# Altium PCB PCB1_ASC.PcbDoc
Units mil, origin at the board's own origin, x right, y up, seen from the top; angles counter-clockwise.
Board outline 2755.91 x 2165.35 mil, 2 copper layers (Top Layer, Bottom Layer); 63 components, 46 nets, 198 pads, 42 vias.
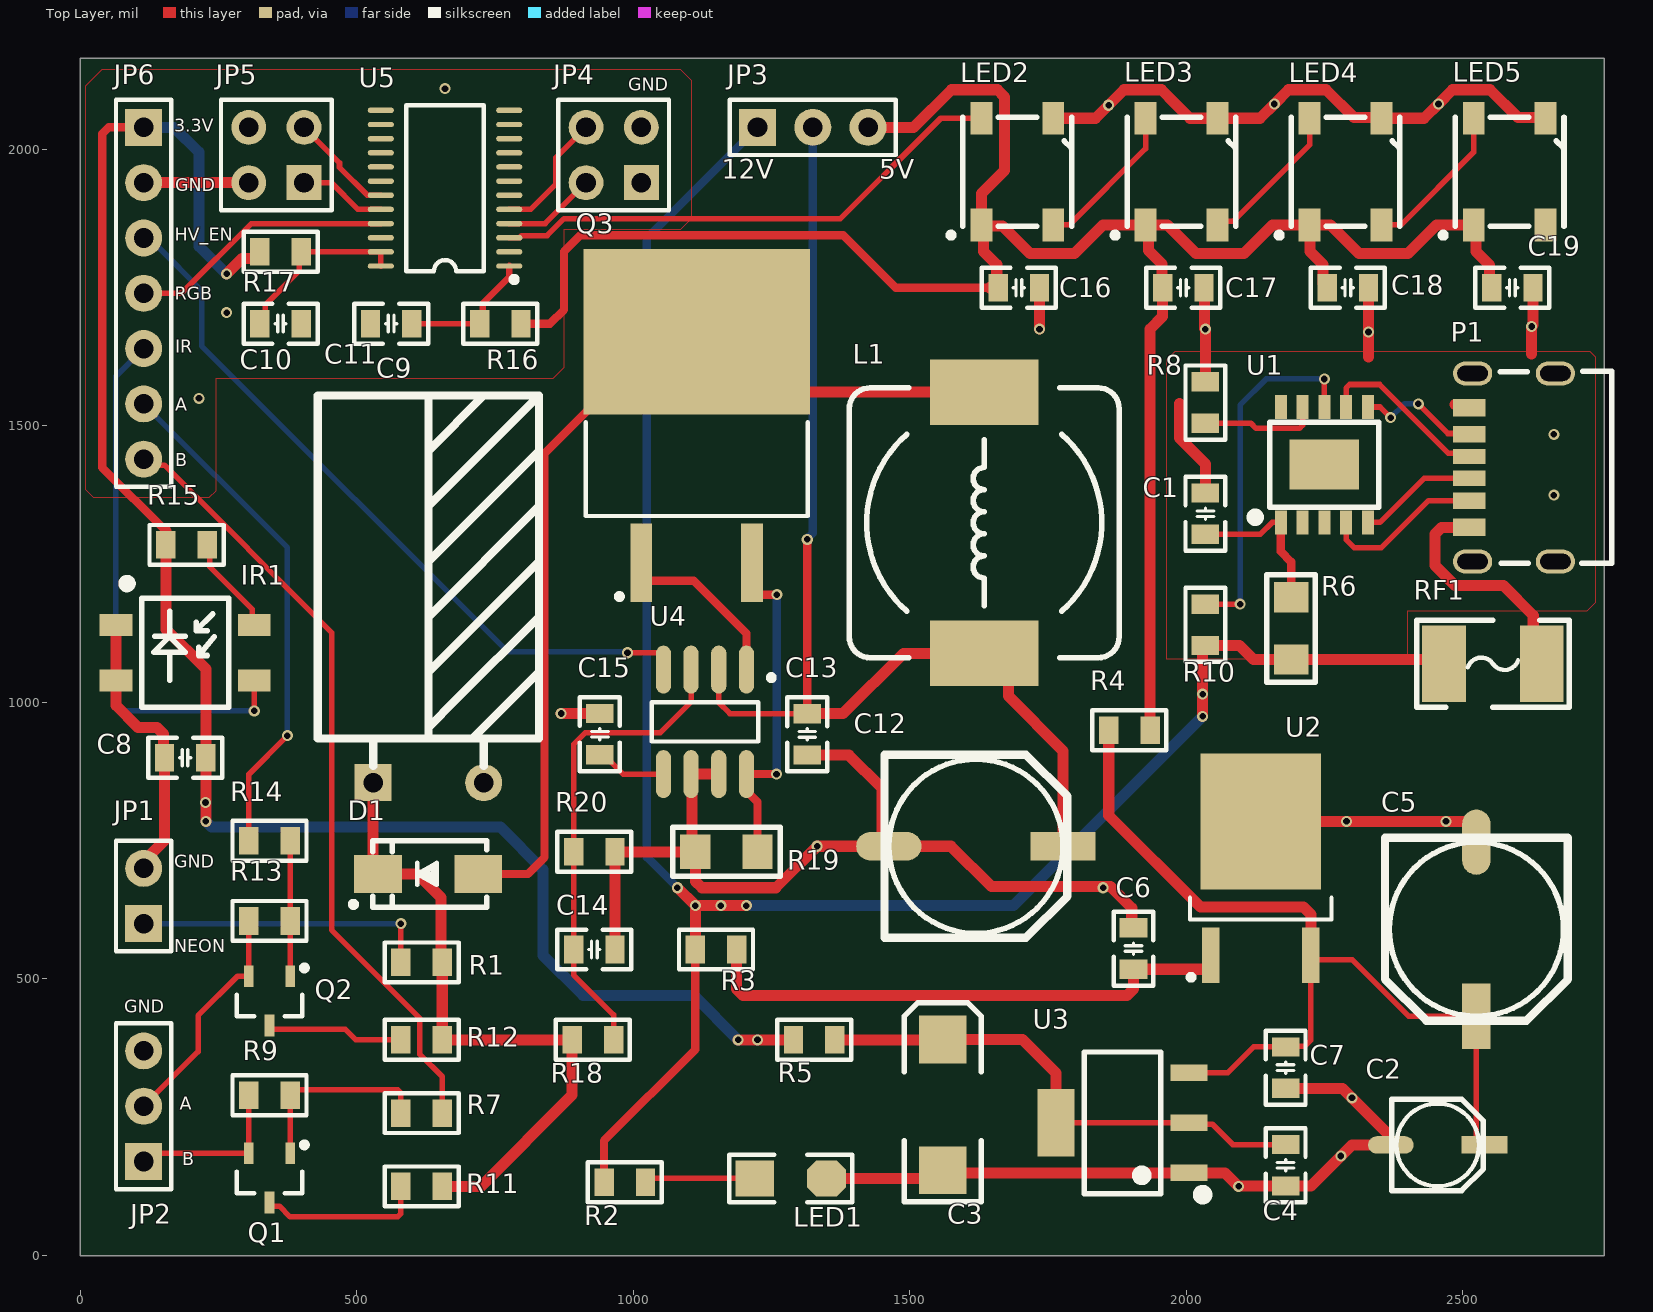
[diagram p0: Top Layer view]
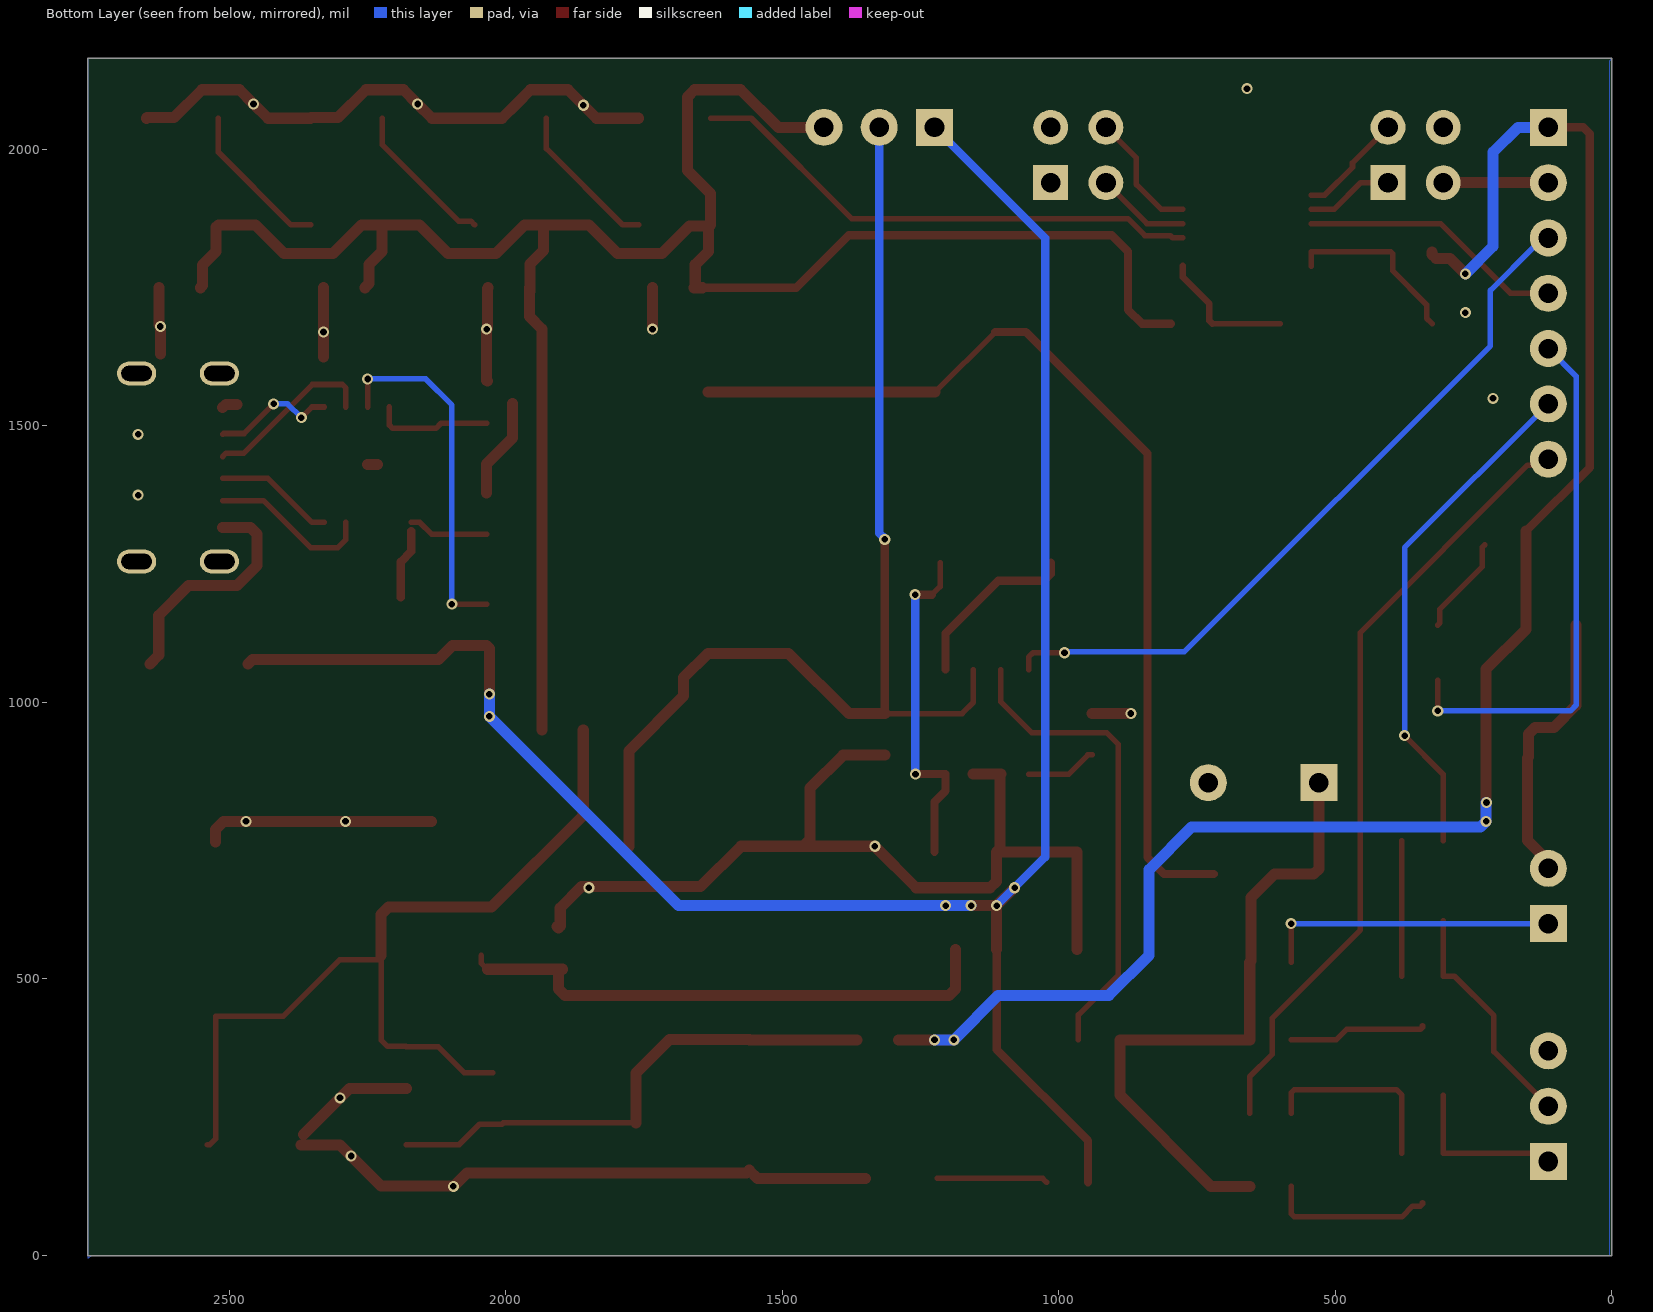
[diagram p1: Bottom Layer view, seen from below]

## Layer stack, top to bottom
Top Solder: solder mask 0.4, Solder Resist, Dk 3.5
Top Layer: signal copper 1.4
Dielectric 1: dielectric 12.6, FR-4, Dk 4.8
Bottom Layer: signal copper 1.4
Bottom Solder: solder mask 0.4, Solder Resist, Dk 3.5

## Board outline
0,0 0,2165.35 2755.91,2165.35 2755.91,0

## Design rules (kind name [scope] priority, off if disabled: settings)
AssemblyTestPointUsage [All] p0: scope1count=1 scope1_0_kind=Board scope1_0_value=Board scope2count=1 scope2_0_kind=Board scope2_0_value=Board commentlength=0
AssemblyTestpoint [All] p0: scope1count=1 scope1_0_kind=Board scope1_0_value=Board scope2count=1 scope2_0_kind=Board scope2_0_value=Board commentlength=0
Clearance [All] p0: scope1count=1 scope1_0_kind=Board scope1_0_value=Board scope2count=1 scope2_0_kind=Board scope2_0_value=Board commentlength=0 gap=10
Clearance [All] p1: gap=10 ignorepadtopadclearanceinfootprint=FALSE except(8: Arc-Arc Arc-Track Track-Track; 12: Arc-SMDPad Arc-THPad Track-SMDPad Track-THPad)
ComponentClearance [All] p0: scope1count=1 scope1_0_kind=Board scope1_0_value=Board scope2count=1 scope2_0_kind=Board scope2_0_value=Board commentlength=0 gap=10 collisioncheckmode=3
DiffPairsRouting [All] p0: scope1count=1 scope1_0_kind=Board scope1_0_value=Board scope2count=1 scope2_0_kind=Board scope2_0_value=Board commentlength=0
FabricationTestPointUsage [All] p0: scope1count=1 scope1_0_kind=Board scope1_0_value=Board scope2count=1 scope2_0_kind=Board scope2_0_value=Board commentlength=0 valid=0 allowmultiple=FALSE
FabricationTestpoint [All] p0: scope1count=1 scope1_0_kind=Board scope1_0_value=Board scope2count=1 scope2_0_kind=Board scope2_0_value=Board commentlength=0 side=3 testpointundercomponent=TRUE minsize=40 maxsize=100 preferedsize=60 minholesize=0 maxholesize=40 preferedholesize=32 testpointgrid=1
FanoutControl Fanout_BGA [All] p0 off: scope1count=1 scope1_0_kind=Board scope1_0_value=Board scope2count=1 scope2_0_kind=Board scope2_0_value=Board commentlength=69 // Protel DXP Scope 1 Expression Was: IsBGA   Fanout_BGA (Default Rule)
FanoutControl Fanout_LCC [All] p0 off: scope1count=1 scope1_0_kind=Board scope1_0_value=Board scope2count=1 scope2_0_kind=Board scope2_0_value=Board commentlength=69 // Protel DXP Scope 1 Expression Was: IsLCC   Fanout_LCC (Default Rule)
FanoutControl Fanout_SOIC [All] p0 off: scope1count=1 scope1_0_kind=Board scope1_0_value=Board scope2count=1 scope2_0_kind=Board scope2_0_value=Board commentlength=71 // Protel DXP Scope 1 Expression Was: IsSOIC   Fanout_SOIC (Default Rule)
FanoutControl Fanout_Small [All] p0 off: scope1count=1 scope1_0_kind=Board scope1_0_value=Board scope2count=1 scope2_0_kind=Board scope2_0_value=Board commentlength=84 // Protel DXP Scope 1 Expression Was: (CompPinCount < 5)   Fanout_Small (Default Rule)
FanoutControl Fanout_Default [All] p0: scope1count=1 scope1_0_kind=Board scope1_0_value=Board scope2count=1 scope2_0_kind=Board scope2_0_value=Board commentlength=30 // Fanout_Default (Default Rule)
Height [All] p0: scope1count=1 scope1_0_kind=Board scope1_0_value=Board scope2count=1 scope2_0_kind=Board scope2_0_value=Board commentlength=0
HoleSize [All] p0: scope1count=1 scope1_0_kind=Board scope1_0_value=Board scope2count=1 scope2_0_kind=Board scope2_0_value=Board commentlength=0 absolutevalues=TRUE maxlimit=100 minlimit=1 maxpercent=80.000 minpercent=20.000
HoleToHoleClearance [All] p0: scope1count=1 scope1_0_kind=Board scope1_0_value=Board scope2count=1 scope2_0_kind=Board scope2_0_value=Board commentlength=0
LayerPairs [All] p0: scope1count=1 scope1_0_kind=Board scope1_0_value=Board scope2count=1 scope2_0_kind=Board scope2_0_value=Board commentlength=0 enforce=TRUE
MinimumSolderMaskSliver [All] p0: scope1count=1 scope1_0_kind=Board scope1_0_value=Board scope2count=1 scope2_0_kind=Board scope2_0_value=Board commentlength=0
NetAntennae [All] p0: scope1count=1 scope1_0_kind=Board scope1_0_value=Board scope2count=1 scope2_0_kind=Board scope2_0_value=Board commentlength=0
PasteMaskExpansion [All] p0: scope1count=1 scope1_0_kind=Board scope1_0_value=Board scope2count=1 scope2_0_kind=Board scope2_0_value=Board commentlength=0 expansion=0
PlaneClearance [All] p0: scope1count=1 scope1_0_kind=Board scope1_0_value=Board scope2count=1 scope2_0_kind=Board scope2_0_value=Board commentlength=0 clearance=8
PlaneClearance [All] p1: clearance=8
PlaneConnect [All] p0: scope1count=1 scope1_0_kind=Board scope1_0_value=Board scope2count=1 scope2_0_kind=Board scope2_0_value=Board commentlength=0 planeconnectstyle=Relief reliefexpansion=20 reliefentries=4 reliefconductorwidth=10 reliefairgap=10
PolygonConnect [All] p0: scope1count=1 scope1_0_kind=Board scope1_0_value=Board scope2count=1 scope2_0_kind=Board scope2_0_value=Board commentlength=0 connectstyle=Relief reliefconductorwidth=15 reliefentries=4 polygonreliefangle="90 Angle"
PolygonConnect [All] p1: thpad.connectstyle=Relief thpad.reliefconductorwidth=15 thpad.reliefentries=4 thpad.polygonreliefangle="90 Angle" thpad.airgapwidth=10 smdpad.connectstyle=Relief smdpad.reliefconductorwidth=15 smdpad.reliefentries=4 smdpad.polygonreliefangle="90 Angle" smdpad.airgapwidth=10 via.connectstyle=Direct via.reliefconductorwidth=10 via.reliefentries=4 via.polygonreliefangle="90 Angle" via.airgapwidth=10
RoutingCorners [All] p0: scope1count=1 scope1_0_kind=Board scope1_0_value=Board scope2count=1 scope2_0_kind=Board scope2_0_value=Board commentlength=0 cornerstyle=45-Degree minsetback=100 maxsetback=100
RoutingLayers [All] p0: scope1count=1 scope1_0_kind=Board scope1_0_value=Board scope2count=1 scope2_0_kind=Board scope2_0_value=Board commentlength=0 top layer=Automatic bottom layer=Automatic
RoutingPriority [All] p0: scope1count=1 scope1_0_kind=Board scope1_0_value=Board scope2count=1 scope2_0_kind=Board scope2_0_value=Board commentlength=0
RoutingTopology [All] p0: scope1count=1 scope1_0_kind=Board scope1_0_value=Board scope2count=1 scope2_0_kind=Board scope2_0_value=Board commentlength=0 topology=Shortest
RoutingVias [All] p0: scope1count=1 scope1_0_kind=Board scope1_0_value=Board scope2count=1 scope2_0_kind=Board scope2_0_value=Board commentlength=0 holewidth=12 width=22 viastyle="Through Hole" minholewidth=12 minwidth=22 maxholewidth=12 maxwidth=22
RoutingVias [All] p1: holewidth=12 width=22 viastyle="Through Hole" minholewidth=12 minwidth=22 maxholewidth=12 maxwidth=22
ShortCircuit [All] p0: scope1count=1 scope1_0_kind=Board scope1_0_value=Board scope2count=1 scope2_0_kind=Board scope2_0_value=Board commentlength=0 allowed=FALSE
SilkToBoardRegionClearance [All] p0: scope1count=1 scope1_0_kind=Board scope1_0_value=Board scope2count=1 scope2_0_kind=Board scope2_0_value=Board commentlength=0
SilkToSilkClearance [All] p0: scope1count=1 scope1_0_kind=Board scope1_0_value=Board scope2count=1 scope2_0_kind=Board scope2_0_value=Board commentlength=0
SilkToSolderMaskClearance [All] p0 off: scope1count=1 scope1_0_kind=Board scope1_0_value=Board scope2count=1 scope2_0_kind=Board scope2_0_value=Board commentlength=44 // Protel DXP Scope 1 Expression Was: IsPad
SilkToSolderMaskClearance [IsPad] p1: minsilkscreentomaskgap=2 clearancetoexposedcopper=TRUE
SolderMaskExpansion [All] p0: scope1count=1 scope1_0_kind=Board scope1_0_value=Board scope2count=1 scope2_0_kind=Board scope2_0_value=Board commentlength=0 expansion=4
SolderMaskExpansion [All] p1: expansion=4 istentingtop=FALSE
UnRoutedNet [All] p0: scope1count=1 scope1_0_kind=Board scope1_0_value=Board scope2count=1 scope2_0_kind=Board scope2_0_value=Board commentlength=0
UnpouredPolygon [All] p0: scope1count=1 scope1_0_kind=Board scope1_0_value=Board scope2count=1 scope2_0_kind=Board scope2_0_value=Board commentlength=0
Width power [All] p0: scope1count=1 scope1_0_kind=NetClass scope1_0_value=power scope2count=1 scope2_0_kind=Board scope2_0_value=Board commentlength=0 maxlimit=30 minlimit=10 preferedwidth=20
Width [All] p0: scope1count=1 scope1_0_kind=Board scope1_0_value=Board scope2count=1 scope2_0_kind=Board scope2_0_value=Board commentlength=0 maxlimit=12 minlimit=6 preferedwidth=10
Width power [InNetClass('power')] p1: maxlimit=30 minlimit=10 preferedwidth=20
Width [All] p2: maxlimit=12 minlimit=6 preferedwidth=10
28 further rules are at their usual default settings.

## Classes and differential pairs
net class power: GND V3.3 V5 V12 VH

## Components (designator, comment, footprint, x,y, rotation, side; value= is the part's Value field where it differs from the comment)
C1 "" "C 0805_L" 2035,1341.4 r90 top
C2 "Cap Pol1" "CM B(4*5.4)" 2455,200 r0 top
C3 "Cap Pol1" "CD C(6032)" 1560,272.28 r270 top
C4 "Cap" "C 0805_L" 2180,163.21 r90 top
C5 "Cap Pol1" "CM E(8*10.2)" 2525,590 r270 top
C6 "Cap" "C 0805_L" 1905,555 r270 top
C7 "Cap" "C 0805_L" 2180,339.69 r90 top
C8 "Cap" "C 0805_L" 190,900 r180 top
C9 "Cap" "C 0805_L" 562.6,1685 r0 top
C10 "Cap" "C 0805_L" 362.6,1685 r0 top
C11 "Cap Pol1" "CAP 5.0*10*16-H - GD" 630,855 r0 top
C12 "Cap Pol1" "CM E(8*10.2)" 1620,740 r0 top
C13 "Cap" "C 0805_L" 1315,942.41 r90 top
C14 "Cap" "C 0805_L" 930,553.33 r180 top
C15 "Cap" "C 0805_L" 940,942.6 r90 top
C16 "Cap" "C 0805_L" 1697.6,1750 r180 top
C17 "Cap" "C 0805_L" 1995.06,1750 r180 top
C18 "Cap" "C 0805_L" 2292.53,1750 r180 top
C19 "Cap" "C 0805_L" 2590,1750 r180 top
D1 "US2G" SMA 629.45,690 r180 top
IR1 "IRM-H6XXT" SMD4_IR 190,1090 r0 top
JP1 "HDR-1X2" HDR2.54-LI-2P 115,650 r90 top
JP2 "HDR-1X3" HDR2.54-LI-3P 115,270 r90 top
JP3 "HDR-1X3" HDR2.54-LI-3P 1325,2040 r0 top
JP4 "Header2X2" HDR2.54-LI-2x2P 965,1990 r90 top
JP5 "Header2X2" HDR2.54-LI-2x2P 355,1990 r90 top
JP6 "HDR-1X7" HDR2.54-LI-7P 115,1740 r270 top
L1 "Inductor Iron" CDRH127 1635,1325 r90 top
LED1 "红色" "LED 1206R" 1285,139.28 r0 top
LED2 "WS2812C" WS2812 1695,1960 r90 top
LED3 "WS2812C" WS2812 1991.67,1960 r90 top
LED4 "WS2812C" WS2812 2288.33,1960 r90 top
LED5 "WS2812C" WS2812 2585,1960 r90 top
P1 "Type-C" USB-C-SMD_10P-P1.00-L6.8-W8.9 2590,1425 r180 top
Q1 "A42" SOT23-3L 342.6,140 r180 top
Q2 "A42" SOT23-3L 342.6,460 r180 top
Q3 "IRF740" TO-263-2L 1115,1500.71 r90 top
R1 "Res Semi" "R 0805_L" 617.59,530 r180 top
R2 "Resistor" "R 0805_L" 985,132.28 r180 top
R3 "Resistor" "R 0805_L" 1150,553.33 r180 top
R4 "Resistor" "R 0805_L" 1897.6,950 r0 top
R5 "Resistor" "R 0805_L" 1327.6,390 r180 top
R6 "Resistor" "R 1206_L" 2190,1134.88 r270 top
R7 "Resistor" "R 0805_L" 617.59,257.5 r0 top
R8 "Resistor" "R 0805_L" 2035,1542.4 r270 top
R9 "Resistor" "R 0805_L" 342.6,290 r180 top
R10 "Resistor" "R 0805_L" 2035,1140.41 r90 top
R11 "Res Semi" "R 0805_L" 617.6,125 r180 top
R12 "Res Semi" "R 0805_L" 617.6,390 r180 top
R13 "Resistor" "R 0805_L" 342.6,605 r180 top
R14 "Resistor" "R 0805_L" 342.6,750 r180 top
R15 "Resistor" "R 0805_L" 192.59,1285 r180 top
R16 "Resistor" "R 0805_L" 760,1685 r0 top
R17 "Resistor" "R 0805_L" 362.59,1815 r180 top
R18 "Res Semi" "R 0805_L" 927.4,390 r0 top
R19 "Res Semi" "R 1206_L" 1169.88,730 r180 top
R20 "Resistor" "R 0805_L" 930,730 r180 top
RF1 "750mA" "FU 1812" 2555,1070 r180 top
U1 "CH224K" ESSOP10 2250,1430 r90 top
U2 "L78M05" TO-252-2L 2135,700 r90 top
U3 "LT1117-3V3" SOT223_L 1885,240 r90 top
U4 "MAX1771" SOIC8 1130,965 r270 top
U5 "SN74LVC4245A" TSSOP24_L 660,1930 r180 top

## Footprints (in the part's own frame and the unit in brackets; to place one, negate y for a bottom-side part, rotate by r counter-clockwise, add the part's x,y. Pads: shape width x height; smd on the part's side, far side on the other; paste and mask are expansions set on the pad)
"C 0805_L" [mil] "无极性贴片电容                                        淘宝ID:黄晶宝石"
  rect 35x50 smd: 1(-37.4,0) 2(37.4,0)
  silkscreen extent -67,-36 67,36
"CAP 5.0*10*16-H - GD" [mm] "脚距5mm直径10mm高度16mm"
  rect 1.7x1.7 hole 0.9: 1(-2.54,0)
  round 1.7 hole 0.9: 2(2.54,0)
  silkscreen extent -5.08,0.76 5.08,17.78
"CD C(6032)" [mm] "长6.0mm，宽3.2mm，厚2.5mm      淘宝ID:黄晶宝石"
  rect 2.2x2.2 smd: 1(-3,0) 2(3,0)
  silkscreen extent -4.7,-1.78 4.44,1.78
CDRH127 [mm] "12*12*8mm（长宽高）"
  rect 3x5 smd: 1(-6,0) 2(6,0)
  silkscreen extent -6.2,-6.2 6.2,6.2
"CM B(4*5.4)" [mm] "贴片电解电容，直径4mm，高5.4mm          淘宝ID:黄晶宝石"
  rect 2.1x0.8 smd: 1(2.15,0)
  oval 2.1x0.8 smd: 2(-2.15,0)
  silkscreen extent -2.1,-2.1 2.1,2.1
"CM E(8*10.2)" [mm] "贴片电解电容，直径8mm，高10.2mm        淘宝ID:黄晶宝石"
  rect 3x1.3 smd: 1(4,0)
  oval 3x1.3 smd: 2(-4,0)
  silkscreen extent -4.2,-4.2 4.2,4.2
ESSOP10 [mm] "ESSOP3.9mm"
  rect 2.3x3.2 smd: 0(0,0)
  rect 1.1x0.55 smd: 1(-2.65,2) 2(-2.65,1) 3(-2.65,0) 4(-2.65,-1) 5(-2.65,-2) 6(2.65,-2) 7(2.65,-1) 8(2.65,0) 9(2.65,1) 10(2.65,2)
  silkscreen extent -2.61,-2.5 1.95,3.37
"FU 1812" [mm] "贴片保险丝          淘宝ID:黄晶宝石"
  rect 2x3.5 smd: 1(-2.25,0) 2(2.25,0)
  silkscreen extent -3.5,-2 3.5,2
HDR2.54-LI-2P [mm] "封装库来自淘宝卖家 ID：黄晶宝石"
  rect 1.7x1.7 hole 0.9: 1(-1.27,0)
  round 1.7 hole 0.9: 2(1.27,0)
  silkscreen extent -2.54,-1.27 2.54,1.27
HDR2.54-LI-2x2P [mm] "封装库来自淘宝卖家 ID：黄晶宝石"
  rect 1.6x1.6 hole 0.9: 1(-1.27,-1.27)
  round 1.6 hole 0.9: 2(-1.27,1.27) 3(1.27,-1.27) 4(1.27,1.27)
  silkscreen extent -2.54,-2.54 2.54,2.54
HDR2.54-LI-3P [mm] "排针，3脚"
  rect 1.7x1.7 hole 0.9: 1(-2.54,0)
  round 1.7 hole 0.9: 2(0,0) 3(2.54,0)
  silkscreen extent -3.81,-1.27 3.81,1.27
HDR2.54-LI-7P [mm] "排针，7脚"
  rect 1.7x1.7 hole 0.9: 1(-7.62,0)
  round 1.7 hole 0.9: 2(-5.08,0) 3(-2.54,0) 4(0,0) 5(2.54,0) 6(5.08,0) 7(7.62,0)
  silkscreen extent -8.89,-1.27 8.89,1.27
"LED 1206R" [mil] "红色1206LED       淘宝ID:黄晶宝石"
  rect 70x65 smd: 1(-65,0)
  oct 70x65 smd: 2(65,0)
  silkscreen extent -111,-43 111,43
"R 0805_L" [mil] "1/8W贴片电阻"
  rect 35x50 smd: 1(-37.4,0) 2(37.4,0)
  silkscreen extent -67,-36 67,36
"R 1206_L" [mil] "1/4W贴片电阻"
  rect 55x62 smd: 1(-55.12,0) 2(57.09,0)
  silkscreen extent -96,-44 98,44
SMA [mm] "4.5x2.6*2.2mm（长宽高，不包括引脚）"
  rect 2.2x1.75 smd: 1(-2.3,0) 2(2.3,0)
  silkscreen extent -2.7,-1.52 3.56,1.52
SMD4_IR [mm]
  rect 1.5x1 smd: 1(-3.175,1.27) 2(-3.175,-1.27) 3(3.175,-1.27) 4(3.175,1.27)
  silkscreen extent -2.87,-2.5 2,3.37
SOIC8 [mm]
  oval 2.2x0.7 smd: 1(-2.4,1.905) 2(-2.4,0.635) 3(-2.4,-0.635) 4(-2.4,-1.905) 5(2.4,-1.905) 6(2.4,-0.635) 7(2.4,0.635) 8(2.4,1.905)
  silkscreen extent -2.16,-2.45 0.9,3.17
SOT23-3L [mm] "3x1.3x1mm(长宽高)    封装库来自淘宝卖家 ID：黄晶宝石"
  rect 0.45x1 smd: 1(-0.95,-1.143) 2(0.95,-1.143) 3(0,1.125)
  silkscreen extent -1.73,-1.65 1.5,0.7
SOT223_L [mm] "6.4x7x1.6mm(长宽高)"
  rect 0.75x1.7 smd: 1(-2.3,-3.048) 2(0,-3.048) 3(2.3,-3.048)
  rect 3.1x1.7 smd: 2(0,3.048)
  silkscreen extent -3.5,-3.88 3.25,1.75
TO-252-2L [mm]
  rect 2.55x0.8 smd: 1(-4,2.3) 2(-4,-2.3)
  rect 6.25x5.55 smd: 3(2.15,0)
  silkscreen extent -5.12,-3.25 -1.35,3.32
TO-263-2L [mm]
  rect 3.6x1 smd: 1(-6.3,2.54) 3(-6.3,-2.54)
  rect 7.6x10.4 smd: 2(4.3,0)
  silkscreen extent -7.97,-5.1 0.15,5.1
TSSOP24_L [mm] "7.8*6.4*1mm（长宽高） 封装库来自淘宝卖家 ID：黄晶宝石"
  oval 1.2x0.25 smd: 1(-2.95,3.575) 2(-2.95,2.925) 3(-2.95,2.275) 4(-2.95,1.625) 5(-2.95,0.975) 6(-2.95,0.325) 7(-2.95,-0.325) 8(-2.95,-0.975) 9(-2.95,-1.625) 10(-2.95,-2.275) 11(-2.95,-2.925) 12(-2.95,-3.575) 13(2.95,-3.575) 14(2.95,-2.925) 15(2.95,-2.275) 16(2.95,-1.625) 17(2.95,-0.975) 18(2.95,-0.325) 19(2.95,0.325) 20(2.95,0.975) 21(2.95,1.625) 22(2.95,2.275) 23(2.95,2.925) 24(2.95,3.575)
  silkscreen extent -3.3,-3.81 1.78,4.32
USB-C-SMD_10P-P1.00-L6.8-W8.9 [mil]
  oval 70.82x43.31 hole 27.56 slot 55.16 at 0 deg: 0(-77.76,170.08) 0(-77.76,-170.08) 0(71.85,170.08) 0(71.85,-170.08)
  rect 59x31.5 smd: 1(77.76,108.25) 6(77.76,-108.25)
  rect 59x29.9 smd: 2(77.76,59.85) 5(77.76,-59.85)
  rect 59x27.6 smd: 3(77.76,19.7) 4(77.76,-19.7)
  silkscreen extent -180,-174 22,174
WS2812 [mm]
  rect 1.5x1 smd: 1(-2.45,1.65) 2(-2.45,-1.65) 3(2.45,-1.65) 4(2.45,1.65)
  silkscreen extent -3.05,-2.5 2.5,3.17

## Part data
C1: library part Cap, "Capacitor"
C2 C3: "Polarized Capacitor (Radial)"
C4 C6 C7 C8 C9 C10 C13 C14 C15 C16 C17 C18 C19: "Capacitor"
C5 C12: library part "Cap Pol1_2", "Polarized Capacitor (Radial)"
C11: library part "Cap Pol1_3", "Polarized Capacitor (Radial)"
D1: library part "D Schottky", "Schottky Diode"
IR1: library part IR
JP1: library part "Header 2", "2P接插件"
JP2 JP3: library part "Header 3", "3P接插件"
JP4 JP5: library part "Header 2X2", "2*2P接插件"
JP6: library part "Header 7", "7P接插件"
L1: "Magnetic-Core Inductor"
LED1: library part LED-SMD, "贴片LED"
LED2 LED3 LED4 LED5: library part WS2812, "RGB发光管"
P1: "Type-C 接口"
Q1 Q2: library part BCP68, "NPN三极管"
Q3: library part NMOS-2, "N-Channel Power MOSFET"
R1 R11 R12 R18 R19: "Semiconductor Resistor"
RF1: library part PPTC, "PPTC自恢复保险丝"
U1: "PD协议受电芯片"
U3: library part AMS1117, "三端稳压芯片"
U5: library part 74LVC4245, "双向电平转换"

## Via types
v1: diameter 20, hole 12, Top Layer to Bottom Layer, tented both sides, 42 vias

## Nets (pads, with @x,y where several pads share a name; then routed paths per layer and width w, separated by ;. In a path a pad name is that pad's centre, name@x,y a point inside that pad or via, vN(x,y) a via of type N, cw(c..) or ccw(c..) an arc to the next point about the centre after c; other vN are vias at no path point)
GND: C1.2 C2.2 C3.2 C4.1 C5.2 C6.1 C7.1 C8.2 C9.1 C10.2 C11.2 C12.2 C13.1 C14.1 C15.2 C16.1 C17.1 C18.1 C19.1 IR1.1 IR1.2 JP1.2 JP2.3 JP4.1 JP4.3 JP5.2 JP5.4 JP6.2 LED1.2 LED2.3 LED3.3 LED4.3 LED5.3 P1.0 P1.6 R8.1 R19.2 R20.1 U1.0 U2.3 U3.1 U4.6 U4.7 U5.2 U5.6 U5.7 U5.8 U5.9 U5.10 U5.11 U5.12 U5.13 U5.14 U5.15 U5.16 U5.17 U5.18 U5.22 | length 5969.5
  Top Layer w20: IR1.1 IR1.2 65,995 105,955 139.24,955 150.96,943.28 150.96,901.65 C8.2 152.6,750.3 115,712.7 JP1.2 ; JP6.2 JP5.2 ; v1(870,980) C15.2 ; C14.1 R20.1 R19.2 ; U4.7 U4.6 1106.45,869.07 1106.45,736.35 R19.2 ; C13.1 1390,905 1450,845 1450,752.52 C12.2 ; LED1.2 1545.11,139.28 C3.2 1564.73,149.45 U3.1 2070.55,149.45 v1(2095,125) ; v1(1735,1675) C16.1 ; LED2.3 1836.46,2056.46 v1(1860,2080) 1887.98,2107.98 1955.5,2107.98 1981.22,2082.26 1981.22,2082.17 2006.94,2056.46 LED3.3 2133.94,2056.46 v1(2159.7,2082.22) 2185.47,2107.98 2253.09,2107.98 2303.61,2057.47 2352.28,2057.47 LED4.3 2430.6,2056.46 v1(2456.37,2082.22) 2482.13,2107.98 2549.76,2107.98 2600.28,2057.47 2648.95,2057.47 LED5.3 ; C6.1@1907.59,595 C6.1 1901.81,595.59 1901.81,628.19 1863.03,666.97 1648.03,666.97 1575,740 C12.2 ; 1988,1540.3 1988,1478.39 2035,1431.39 C1.2 ; C17.1 2033.73,1748.74 2033.73,1676.27 v1(2035,1675) 2035,1582.33 R8.1@2033.73,1581.07 ; v1@2095,125.81 C4.1 2225.81,125.81 v1(2280,180) 2300,200 C2.2 ; U2.3 v1@2290,784.65 ; C7.1 2282.72,302.28 v1(2300,285) 2366.39,218.61 ; U1.0@2232.28,1430 U1.0 ; v1(2290,785) v1(2470,785) 2510.6,785 2525,770.6 C5.2 ; C18.1 2329.93,1625.07 2330,1625 ; P1.6@2486.01,1538.99 2506.49,1538.99 P1.6 ; 2625,1630 v1(2625,1680) 2627.4,1682.4 C19.1 ; R19.2 1112.8,676.72 1124.51,665 1258.02,665 v1(1333.02,740) C12.2
  other v1: 1850,665 2665,1375 2665,1485 215,1550 2330,1670 265,1705 660,2110
HV_EN: JP6.3 U4.4 | length 1303.8
  Top Layer w10: v1(990,1090) 1046.89,1090 1055,1081.89 U4.4
  Bottom Layer w10: JP6.3@140,1825 220,1745 220,1645 773.09,1091.91 988.09,1091.91 v1(990,1090)
IR: IR1.3 JP6.5 | length 975.2
  Top Layer w10: v1(315,985) IR1.3
  Bottom Layer w10: JP6.5 64.54,1589.54 64.54,995.46 75,985 v1(315,985)
NetC1_1: C1.1 R6.1 U1.1 | length 273.2
  Top Layer w10: C1.1 2134,1304 2155.86,1325.86 2171.07,1325.86 U1.1
  Top Layer w15: U1.1@2171.26,1310 2171.26,1273.04 2190,1254.3 R6.1
NetC2_1: C2.1 C5.1 C7.2 R4.1 U2.2 U3.3 | length 1632.8
  Top Layer w10: U3.3@2023.7,330.55 2075.55,330.55 2122.08,377.08 C7.2 2180.96,378.04 2214.15,378.04 2225.55,389.45 U2.2 2233.07,535 2300.28,535 2402.76,432.52 C5.1 2525,210.75 2535.75,200 C2.1
  Top Layer w20: R4.1 1860.2,796.05 2026.25,630 2211.96,630 2225.55,616.41 U2.2
NetC3_1: C3.1 C4.2 R5.1 U3.2 | length 946.5
  Top Layer w10: C3.1@1559.61,390 C3.1 ; U3.2@1765,240 2005,240 2007.61,237.39 2047.61,237.39 2084.39,200.61 C4.2
  Top Layer w20: R5.1 C3.1@1559.61,390 ; C3.1 1704.61,390.39 1765,330 U3.2@1765,240
NetC6_2: C6.2 R3.1 U2.1 | length 1000.4
  Top Layer w10: U2.1@2033.7,517.6 2044.45,528.35 U2.1
  Top Layer w20: R3.1 1187.4,481.72 1199.12,470 1893.28,470 1905,481.72 C6.2 ; C6.2@1897.5,517.6 U2.1@2033.7,517.6
NetC9_2: C9.2 R16.1 U5.1 | length 249
  Top Layer w10: C9.2 R16.1
  Top Layer w12: R16.1 727.99,1690.4 727.99,1720.97 776.14,1769.11 U5.1
NetC10_1: C10.1 R17.1 U5.23 U5.24 | length 330.5
  Top Layer w10: C10.1 334.87,1694.68 334.87,1719.03 396.7,1780.86 396.7,1811.7 R17.1 403.76,1815 525.16,1815 525.31,1814.84 U5.23 U5.24
NetC12_1: C12.1 C13.2 JP3.2 L1.1 U4.2 | length 2047.6
  Top Layer w10: U4.2 1155,1000 1175.2,979.8 C13.2 C13.2@1322.5,979.8
  Top Layer w15: C13.2 v1(1315,1295)
  Top Layer w20: C13.2 1379.8,979.8 1488.78,1088.78 L1.1 1678.56,1045.22 1678.56,1011.44 1777.48,912.52 C12.1
  Bottom Layer w15: v1(1315,1295) 1315,1296.29 1325,1306.29 JP3.2@1325,2015
NetC14_2: C14.2 R18.2 R20.2 U4.3 | length 866.8
  Top Layer w10: R18.2 964.8,435.2 892.6,507.4 C14.2 892.6,924.34 913.76,945.5 1049.32,945.5 1105,1001.18 U4.3
NetC15_1: C15.1 U4.5 | length 129.4
  Top Layer w10: C15.1 947.5,905.2 982.18,870.51 U4.5
NetD1_1: D1.1 L1.2 Q3.2 | length 1793.7
  Top Layer w10: Q3.2 Q3.2@1223.78,1561.22
  Top Layer w15: D1.1 810,690 840,720 840,1450.12 1059.88,1670 Q3.2
  Top Layer w20: Q3.2@1223.78,1561.22 L1.2
NetIR1_4: IR1.4 R15.1 | length 180.2
  Top Layer w10: R15.1 234.14,1280.86 234.14,1245.86 311.17,1168.83 311.17,1143.83 IR1.4
NetJP1_1: JP1.1 R1.2 | length 515.1
  Top Layer w10: v1(580,600) 580.2,599.8 R1.2
  Bottom Layer w10: JP1.1@135,600 v1(580,600)
NetJP2_1: JP2.1 Q1.2 R9.2 | length 301.4
  Top Layer w10: JP2.1 130,185 Q1.2 R9.2
NetJP2_2: JP2.2 Q2.2 R13.2 | length 425.6
  Top Layer w10: JP2.2 213.62,368.62 213.62,433.62 285,505 Q2.2 R13.2
NetJP4_2: JP4.2 U5.4 | length 169.5
  Top Layer w10: U5.4 841.02,1866.02 JP4.2
NetJP4_4: JP4.4 U5.5 | length 228.5
  Top Layer w10: U5.5 814.76,1891.61 859.81,1936.66 859.81,1984.81 JP4.4
NetJP5_1: JP5.1 U5.20 | length 158.9
  Top Layer w10: JP5.1 454.21,1940 502.6,1891.61 U5.20
NetJP5_3: JP5.3 U5.19 | length 194.4
  Top Layer w10: JP5.3 469.19,1975.81 469.19,1967.76 519.67,1917.28 543.78,1917.28 U5.19
NetLED1_1: LED1.1 R2.1 | length 200.5
  Top Layer w10: R2.1 1029.4,139.28 LED1.1
NetLED2_2: LED2.2 LED3.4 | length 278.7
  Top Layer w10: LED2.2 1760.2,1863.79 1788.79,1863.79 1926.71,2001.71 LED3.4
NetLED3_2: LED3.2 LED4.4 | length 274.8
  Top Layer w10: LED3.2 2063.54,1870.45 2085.45,1870.45 2223.37,2008.37 LED4.4
NetLED4_2: LED4.2 LED5.4 | length 282.6
  Top Layer w10: LED4.2 2388.54,1863.54 2520.04,1995.04 LED5.4
NetP1_1: P1.1 RF1.1 | length 433.5
  Top Layer w20: P1.1 2461.72,1316.75 2450,1305.03 2450,1247.59 2486.32,1211.27 2573.73,1211.27 2627.82,1157.18 2627.82,1085.76 RF1.1
NetP1_2: P1.2 U1.4 | length 295.4
  Top Layer w10: U1.4 2289.37,1294.43 2303.8,1280 2353.22,1280 2438.37,1365.15 P1.2
NetP1_3: P1.3 U1.5 | length 216.5
  Top Layer w10: U1.5 2350.67,1325.67 2430.3,1405.3 P1.3
NetP1_4: P1.4 U1.7 | length 313.8
  Top Layer w10: U1.7 2289.37,1568.59 2295.78,1575 2350,1575 2474.02,1450.98 2505.96,1450.98 P1.4
NetP1_5: P1.5 U1.6 | length 224.7
  Top Layer w10: U1.6 2350.67,1534.33 v1(2370,1515) ; v1(2420,1540) 2473.6,1486.4 2510.69,1486.4 P1.5
  Bottom Layer w10: v1(2370,1515) 2395,1540 v1(2420,1540)
NetQ1_1: Q1.1 R7.1 R9.1 | length 348.4
  Top Layer w10: Q1.1 R9.1 390,300 574.33,300 580.19,294.14 R7.1
NetQ1_3: Q1.3 R11.2 | length 301.3
  Top Layer w10: Q1.3 342.6,93.26 346.46,89.4 360.6,89.4 380,70 574.34,70 580.2,75.86 R11.2
NetQ2_1: Q2.1 R13.1 R14.1 | length 245
  Top Layer w10: Q2.1 R13.1 R14.1
NetQ2_3: Q2.3 R12.2 | length 250
  Top Layer w10: Q2.3 342.6,412.72 346.46,408.86 480,408.86 498.86,390 R12.2
NetQ3_1: Q3.1 U4.1 | length 320.4
  Top Layer w15: Q3.1 1015,1232.19 1027.19,1220 1110,1220 1205,1125 U4.1
NetQ3_3: Q3.3 R19.1 U4.8 | length 622.8
  Top Layer w10: Q3.3 1215,1209.69 Q3.3@1229.69,1195 ; v1(1259.49,870.51) v1@1260,870
  Top Layer w15: R19.1 1225,820.28 1205,840.28 U4.8 v1(1259.49,870.51) ; Q3.3@1229.69,1195 v1(1260,1195)
  Bottom Layer w10: v1(1259.49,870.51) v1@1259.74,870.77 ; v1@1259.74,1194.74 v1(1260,1195)
  Bottom Layer w15: v1@1259.74,870.77 v1@1259.74,1194.74
NetR8_2: R8.2 U1.9 | length 214.9
  Top Layer w10: R8.2 2117.4,1505 2126.85,1495.55 2204.77,1495.55 2210.63,1501.41 U1.9
NetR10_2: R10.2 U1.8 | length 648.3
  Top Layer w10: R10.2 v1(2097.81,1177.81) v1@2100,1180 ; U1.8 v1(2250,1585)
  Bottom Layer w10: v1(2097.81,1177.81) 2097.81,1537.81 2145,1585 v1(2250,1585)
NixieTubeA: JP6.6 R14.2 | length 926.6
  Top Layer w10: R14.2 305.2,870.2 v1(375,940)
  Bottom Layer w10: JP6.6 375,1280 v1(375,940)
NixieTubeB: JP6.7 R7.2 | length 1421.7
  Top Layer w10: JP6.7 125.89,1429.11 152.43,1429.11 455,1126.54 455,588.65 614.7,428.96 614.7,363.76 654.99,323.47 R7.2
RGB: LED2.4 U5.3 | length 943.4
  Top Layer w10: U5.3 794.69,1840.43 798.35,1844.1 844.56,1844.1 875.46,1875 1375,1875 1556.46,2056.46 LED2.4
RGB_ESP: JP6.4 U5.21 | length 481.1
  Top Layer w10: JP6.4 183.66,1740 309.68,1866.02 U5.21
V3.3: C8.1 JP6.1 R5.2 R15.2 R17.2 | length 3226.3
  Top Layer w15: JP6.1 51.72,2040 40,2028.28 40,1425 R15.2@155.2,1309.8
  Top Layer w20: R15.2@155.2,1309.8 R15.2 155.2,1132.36 227.4,1060.15 C8.1 v1(227.4,785) ; v1(265,1775) 292.63,1802.63 317.7,1802.63 325.2,1810.13 R17.2 ; v1(1190,390) v1(1225,390) R5.2
  Bottom Layer w20: JP6.1 170,2040 215,1995 215,1825 v1(265,1775) ; v1(226.96,819.18) 227.4,818.74 v1(227.4,785) 237.4,775 760,775 837.5,697.5 837.5,542.5 910,470 1110,470 v1(1190,390) v1(1225,390)
V5: C16.2 C17.2 C18.2 C19.2 JP3.3 LED2.1 LED3.1 LED4.1 LED5.1 R4.2 R16.2 | length 3900.3
  Top Layer w15: R16.2 850,1685 875,1710 875,1815.44 904.56,1845 1380,1845 1475,1750 C16.2@1645,1750
  Top Layer w20: JP3.3 1507.47,2040 1575.46,2107.98 1658.84,2107.98 1671.72,2095.1 1671.72,1961.72 1630.04,1920.04 LED2.1 ; C16.2@1645,1750 C16.2 1657.63,1752.57 1657.63,1792.37 1634.07,1815.93 1634.07,1859.52 LED2.1 ; R4.2 1935,1674.95 1957.66,1697.62 C17.2 ; C17.2@1957.66,1742.5 1956.71,1743.46 1956.71,1793.29 1932.4,1817.6 1932.4,1857.85 LED3.1 ; C18.2 2247.63,1757.5 2247.63,1792.37 2224.27,1815.73 2224.27,1862.65 LED4.1 ; C19.2 2548.84,1753.77 2548.84,1791.16 2524.07,1815.93 2524.07,1859.52 LED5.1 2452.95,1863.54 2401.43,1812.02 2312.98,1812.02 2261.46,1863.54 LED4.1 ; LED2.1 1631.59,1861.99 1668.01,1861.99 1717.98,1812.02 1798.33,1812.02 1849.85,1863.54 LED3.1 ; LED3.1 1966.46,1863.54 2017.99,1812.01 2104.76,1812.01 2156.29,1863.54 LED4.1
V12: JP3.1 R2.2 R3.2 R6.2 R10.1 RF1.2 | length 3861.8
  Top Layer w15: R2.2 947.6,207.6 1112.6,372.6 R3.2
  Top Layer w20: v1@1080,665 v1(1080.2,665) v1(1112.6,632.6) ; R3.2 v1(1112.6,632.6) ; v1(1205,632.6) v1(1158.8,632.6) v1(1112.6,632.6) ; v1(2030,975) v1(2030,1015) 2030,1098 R10.1 2097,1103 2122.2,1077.8 R6.2 2458.62,1077.8 RF1.2
  Bottom Layer w15: v1(1112.6,632.6) 1025,720.2 1025,1840 JP3.1
  Bottom Layer w20: v1(1158.8,632.6) v1(1205,632.6) 1687.6,632.6 v1(2030,975) v1(2030,1015)
VH: C11.1 D1.2 R1.1 R11.1 R12.1 R18.1 | length 1196.8
  Top Layer w20: C11.1 530,698.9 539.39,689.51 610.49,689.51 652.76,647.24 652.76,532.24 R1.1 R12.1 882.5,390 R18.1 890,290 725,125 R11.1
pads on no net: LED5.2 U1.2 U1.3 U1.10

## Polygon pours and split planes (outlines as drawn)
GND on Top Layer "GND_L01_P001" (solid, remove dead copper, pour order 1): 2740,1180 2725,1165 2400,1165 2400,1077.8 1965,1077.8 1965,1620 1980,1635 2730,1635 2740,1625
GND on Top Layer "GND_L01_P000" (solid, remove dead copper, pour order 0): 245,1381.83 233.17,1370 25,1370 10,1385 10,2115 40,2145 1085,2145 1105,2125 1105,1875 1085,1855 875,1855 875,1605 855,1585 245,1585
GND on Bottom Layer "GND_L02_P002" (solid, pour order 2): 0,2165 5,2160 5,0 2750,0 2755,-5 2755,2165 5,2165

## Silkscreen, mask and mechanical layers (free items; w line width, h text height)
Top Overlay:
  text "GND" at 991.18,2098.04 h39.37
  text "3.3V" at 170.55,2023.92 h39.37
  text "5V" at 1445,1935.63 h60
  text "12V" at 1160,1935 h60
  text "GND" at 172.13,1916.63 h39.37
  text "HV_EN" at 170.97,1826.9 h39.37
  text "RGB" at 170.97,1720.31 h39.37
  text "IR" at 172.53,1624.32 h39.37
  text "A" at 172.53,1519.32 h39.37
  text "B" at 172.53,1419.32 h39.37
  text "GND" at 170.8,692.95 h39.37
  text "NEON" at 170,540.41 h39.37
  text "GND" at 80,430.41 h39.37
  text "A" at 180,255 h39.37
  text "B" at 185,155 h39.37

## Text inside footprints (layer, text, board x,y; h text height)
JP1: Mechanical 13 "Cap" at 1937.1,1249.31 h60